# Altium PCB ESP32PCBc[1].PcbDoc (part 3 of 3)
Units mil, origin at the board's own origin, x right, y up, seen from the top; angles counter-clockwise.
Board outline 5118.11 x 3346.46 mil, 4 copper layers (L1, L2, L3, L4), stack 61.583 mil thick; 55 components, 53 nets, 223 pads, 182 vias.
Unrouted connection lines stored in the file: 1.
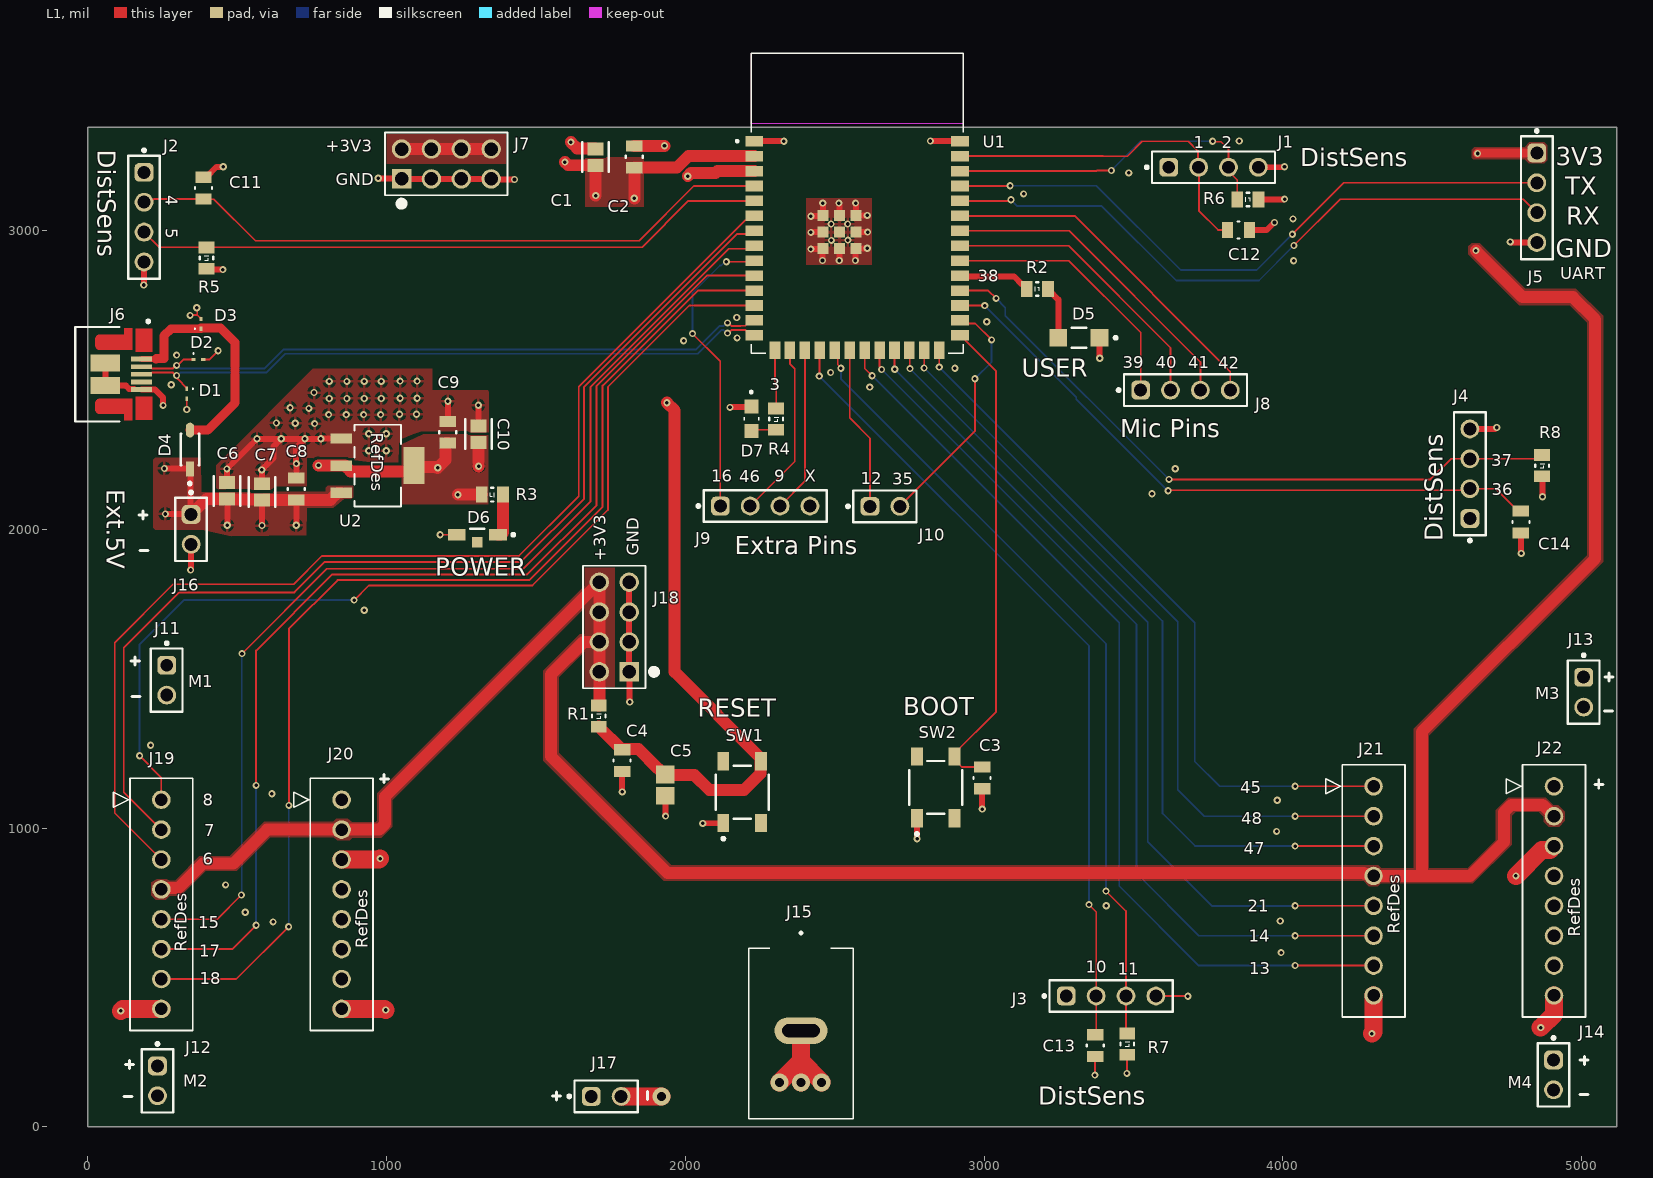
[diagram p0: L1 view]

## Part data (continued)
SW1 SW2: "Switch Tactile OFF Mom SPST Round Button Gull Wing 50mA 12VDC 100000Cycles 1.77N Surface Mount T/R", Contact Current Rating=50mA, Contact Resistance=100mΩ, Insulation Resistance=100MΩ, Manufacturer="C&K Components", Max Operating Temperature=70°C, Max Voltage Rating (DC)=12V, Min Operating Temperature=-40°C, Operating Force=2.26N, Supplier Part Number=108-PTS647SM38SMTR2LFSCT-ND, Category="Tactile Switches", ComponentLink1Description=https://datasheet.octopart.com:443/PTS647SM38SMTR2LFS-C%26K-Components-datasheet-180017464.pdf?src-supplier=IHS, ComponentLink1URL=https://datasheet.octopart.com:443/PTS647SM38SMTR2LFS-C%26K-Components-datasheet-180017464.pdf?src-supplier=IHS, ComponentLink2Description=https://datasheet.octopart.com:443/PTS647SM38SMTR2LFS-C%26K-Components-datasheet-117317067.pdf?src-supplier=Future+Electronics, ComponentLink2URL=https://datasheet.octopart.com:443/PTS647SM38SMTR2LFS-C%26K-Components-datasheet-117317067.pdf?src-supplier=Future+Electronics, ComponentLink3Description=https://datasheet.octopart.com:443/PTS647SM38SMTR2-LFS-C%26K-Components-datasheet-175422368.pdf?src-supplier=Farnell, ComponentLink3URL=https://datasheet.octopart.com:443/PTS647SM38SMTR2-LFS-C%26K-Components-datasheet-175422368.pdf?src-supplier=Farnell, ComponentLink4Description=https://datasheet.octopart.com:443/PTS647SM38SMTR2LFS-C%26K-Components-datasheet-145017121.pdf?src-supplier=Electro+Sonic, ComponentLink4URL=https://datasheet.octopart.com:443/PTS647SM38SMTR2LFS-C%26K-Components-datasheet-145017121.pdf?src-supplier=Electro+Sonic, ComponentLink5Description=https://datasheet.octopart.com:443/PTS-647-SM38-SMTR2-LFS-C%26K-Components-datasheet-119449707.pdf?src-supplier=RS+(Formerly+Allied+Electronics), ComponentLink5URL=https://datasheet.octopart.com:443/PTS-647-SM38-SMTR2-LFS-C%26K-Components-datasheet-119449707.pdf?src-supplier=RS+(Formerly+Allied+Electronics), Electrical Life=100kcycles, Height=2.9mm, Length=4.5mm, Life (Cycles)=100kcycles, Lifecycle Status=Production, Manufacturer Part Number=PTS647SM38SMTR2LFS, Max Current Rating=50mA, Mounting Technology="Surface Mount", Number of Positions=1, Pricing="1=0.26, 10=0.226, 25=0.2116, 100=0.1897, 250=0.17588, 500=0.16596, 1000=0.15666 (USD)", REACH SVHC=Yes, RoHS=Compliant, Schedule B="8536509065, 8536509065|8536509065, 8536509065|8536509065|8536509065, 8536509065|8536509065|8536509065|8536509065", Stock=37562, Supplier=DigiKey, Throw Configuration=SPST, Voltage Rating (DC)=12V
U1: "SMD module, ESP32-S3R8 with 8 MB Octal PSRAM die inside, 8 MB Quad SPI flash, P", Manufacturer="Espressif Systems", Manufacturer Part Number=ESP32-S3-WROOM-1-N8R8, Max Operating Temperature=65°C, Max Supply Voltage=3.6V, Min Operating Temperature=-40°C, Min Supply Voltage=3V, Operating Supply Voltage=3.3V, Package=None, Supplier Part Number=5407-ESP32-S3-WROOM-1-N8R8DKR-ND, Supplier Part Number 1=5407-ESP32-S3-WROOM-1-N8R8CT-ND, Availability="In Stock", Category="RF Transceiver Modules and Modems", Check_prices=https://www.snapeda.com/parts/ESP32-S3-WROOM-1-N8R8/Espressif+Systems/view-part/?ref=eda, ComponentLink1Description=https://datasheet.octopart.com:443/ESP32-S3-WROOM-1-N8R8-Espressif-Systems-datasheet-165560563.pdf?src-supplier=IHS, ComponentLink1URL=https://datasheet.octopart.com:443/ESP32-S3-WROOM-1-N8R8-Espressif-Systems-datasheet-165560563.pdf?src-supplier=IHS, ComponentLink2Description=https://datasheet.octopart.com:443/ESP32-S3-WROOM-1-N8R8-Espressif-Systems-datasheet-175575506.pdf?src-supplier=SOS+electronic, ComponentLink2URL=https://datasheet.octopart.com:443/ESP32-S3-WROOM-1-N8R8-Espressif-Systems-datasheet-175575506.pdf?src-supplier=SOS+electronic, ComponentLink3Description=https://datasheet.octopart.com:443/ESP32-S3-WROOM-1-N8R8-Espressif-Systems-datasheet-164663773.pdf?src-supplier=SOS+electronic, ComponentLink3URL=https://datasheet.octopart.com:443/ESP32-S3-WROOM-1-N8R8-Espressif-Systems-datasheet-164663773.pdf?src-supplier=SOS+electronic, ComponentLink4Description=https://datasheet.octopart.com:443/ESP32-S3-WROOM-1-N8R8-Espressif-Systems-datasheet-188867343.pdf?src-supplier=TME, ComponentLink4URL=https://datasheet.octopart.com:443/ESP32-S3-WROOM-1-N8R8-Espressif-Systems-datasheet-188867343.pdf?src-supplier=TME, ComponentLink5Description=https://datasheet.octopart.com:443/ESP32-S3-WROOM-1-N8R8-Espressif-Systems-datasheet-165560559.pdf?src-supplier=TME, ComponentLink5URL=https://datasheet.octopart.com:443/ESP32-S3-WROOM-1-N8R8-Espressif-Systems-datasheet-165560559.pdf?src-supplier=TME, Height - Seated (Max)=3.25mm, Length=25.5mm, MF="Espressif Systems", MP=ESP32-S3-WROOM-1-N8R8, Number of Terminals=41, Price=None, Pricing="1=6.13, 10=5.313, 25=5.0276, 100=4.635, 250=4.39984 (USD)", Purchase-URL=https://pricing.snapeda.com/search?q=ESP32-S3-WROOM-1-N8R8&ref=eda, REACH SVHC=Yes, RoHS=Compliant, SnapEDA_Link=https://www.snapeda.com/parts/ESP32-S3-WROOM-1-N8R8/Espressif+Systems/view-part/?ref=snap, Stock=8462, Supplier=DigiKey, Supplier 1=DigiKey, Terminal Pitch=1.27mm, Width=18mm
U2: "800-mA 15-V linear voltage regulator 800-mA 15-V linear voltage regulator", Ambient Temperature Range High=125°C, Case/Package=SOT-223, Dropout Voltage=1.07V, Manufacturer=onsemi, Manufacturer Lifecycle Status=ACTIVE, Max Junction Temperature (Tj)=150°C, Max Supply Voltage=15V, Min Input Voltage=4.75V, Min Operating Temperature=0°C, Output Current=800mA, Output Voltage=3.3V, Supplier Part Number=488-LM1117MPX-33NOPBDKR-ND, Voltage Tolerance=2%, Accuracy=1%, Category="LDO Voltage Regulators", China RoHS=Compliant, ComponentLink1Description=https://datasheet.octopart.com:443/LM1117MPX-33NOPB-onsemi-datasheet-164331219.pdf?src-supplier=Upverter, ComponentLink1URL=https://datasheet.octopart.com:443/LM1117MPX-33NOPB-onsemi-datasheet-164331219.pdf?src-supplier=Upverter, ComponentLink2Description=https://sigma.octopart.com:443/138897734/technical_drawing/onsemi-LM1117MPX-33NOPB.pdf?src-supplier=Upverter, ComponentLink2URL=https://sigma.octopart.com:443/138897734/technical_drawing/onsemi-LM1117MPX-33NOPB.pdf?src-supplier=Upverter, ComponentLink3Description=https://datasheet.octopart.com:443/LM1117MPX-33NOPB-ON-Semiconductor-datasheet-141931467.pdf?src-supplier=JRH+Electronics, ComponentLink3URL=https://datasheet.octopart.com:443/LM1117MPX-33NOPB-ON-Semiconductor-datasheet-141931467.pdf?src-supplier=JRH+Electronics, ComponentLink4Description=https://datasheet.octopart.com:443/LM1117MPX-33NOPB-onsemi-datasheet-180961324.pdf?src-supplier=IHS, ComponentLink4URL=https://datasheet.octopart.com:443/LM1117MPX-33NOPB-onsemi-datasheet-180961324.pdf?src-supplier=IHS, ComponentLink5Description=https://datasheet.octopart.com:443/LM1117MPX-33NOPB-onsemi-datasheet-168933395.pdf?src-supplier=Future+Electronics, ComponentLink5URL=https://datasheet.octopart.com:443/LM1117MPX-33NOPB-onsemi-datasheet-168933395.pdf?src-supplier=Future+Electronics, ComponentLink6Description=http://sigma.octopart.com:80/reach_statement/ON-Semiconductor-company-79.pdf?src-supplier=Compliance+Statements, ComponentLink6URL=http://sigma.octopart.com:80/reach_statement/ON-Semiconductor-company-79.pdf?src-supplier=Compliance+Statements, ComponentLink7Description=https://octopart.com:443/opatz8j6/c1?t=Iw_9X4aOcrUl-cPA66dx16ukuJxMweABa0km8qscBKXSU1vYCRq_e4FXJATwxyh124XiaTPtNJ3B9yRxDq_EhavdUU79idWvw_QVFCQ2fS5CQqS4hTb1ifBnFTR-Su749rPEe84Onex6ks4rk9ucP4YVcK4nPzU0XZG6GDKd_pBht-2jM3AE4nGkwXEe6Ksn9x1m2VuOf8AcrWjARzJEmpW0n5uUxMgVrQJ7fVm_XNdLbK-fij8J55BUuF-vYILHBnvsIretFbyyyfqB2jts5YEtD5ypze82yLluaey9lD5qNXSO72sWgsX8XjPSqf-JEzZbFkY95Oi87kzI9m6odTwj0wO7px43NJiKE00YhpVnv7QYBQ&src-supplier=Compliance+Statements, ComponentLink7URL=https://octopart.com:443/opatz8j6/c1?t=Iw_9X4aOcrUl-cPA66dx16ukuJxMweABa0km8qscBKXSU1vYCRq_e4FXJATwxyh124XiaTPtNJ3B9yRxDq_EhavdUU79idWvw_QVFCQ2fS5CQqS4hTb1ifBnFTR-Su749rPEe84Onex6ks4rk9ucP4YVcK4nPzU0XZG6GDKd_pBht-2jM3AE4nGkwXEe6Ksn9x1m2VuOf8AcrWjARzJEmpW0n5uUxMgVrQJ7fVm_XNdLbK-fij8J55BUuF-vYILHBnvsIretFbyyyfqB2jts5YEtD5ypze82yLluaey9lD5qNXSO72sWgsX8XjPSqf-JEzZbFkY95Oi87kzI9m6odTwj0wO7px43NJiKE00YhpVnv7QYBQ&src-supplier=Compliance+Statements, Height=1.8mm, Height - Seated (Max)=1.8mm, Length=6.5mm, Lifecycle Status=Production, Manufacturer Part Number=LM1117MPX-33NOPB, Max Operating Temperature=125°C, Number of Channels=1, Number of Circuits=1, Number of Outputs=1, Number of Terminals=4, Pricing="1=0.57, 10=0.4, 25=0.3576, 100=0.3116, 250=0.28964, 500=0.27638, 1000=0.26546 (USD)", REACH SVHC=Yes, RoHS=Compliant, Stock=7642, Supplier=DigiKey, Terminal Pitch=2.3mm, Width=3.5mm

## Via types
v1: diameter 24, hole 12, L1 to L4, tented both sides, 178 vias
v2: diameter 60, hole 30, L1 to L4, tented both sides, 4 vias

## Nets (pads, with @x,y where several pads share a name; then routed paths per layer and width w, separated by ;. In a path a pad name is that pad's centre, name@x,y a point inside that pad or via, vN(x,y) a via of type N, cw(c..) or ccw(c..) an arc to the next point about the centre after c; other vN are vias at no path point)
3V3: C1.2 C2.2 C9.2 C10.2 J5.1 J7.5 J7.6 J7.7 J7.8 J18.5 J18.6 J18.7 J18.8 J19.4 J20.2 J21.4 J22.2 R1.1 R3.2 U1.2 U2.2 | length 13864.4
  L1 w30: v1(4652,3258) 4653,3259 4849,3259 J5.1
  L1 w40: J19.4 250.04,798.97 302.66,798.97 384.69,881 486,881 599.76,994.76 J20.2 974.76,994.76 995,1015 995,1106 J18.5 J18.6 J18.7 ; v1(772,2214) 772.5,2213.5 847.5,2213.5 848,2213 860.5,2213 879.5,2194 1076.5,2194 U2.2@1092,2209.5 ; J7.8 J7.7 J7.6 J7.5 ; U2.2@1092,2213 1103.29,2213 1107.5,2208.79 1168.21,2208.79 v1(1171,2206) 1197.44,2232.44 1197.44,2287.28 1198.74,2288.58 C9.2 ; v1@1238.98,2116 R3.2 ; v1(1308,2211) C10.2 ; v1(1596.65,3229.39) 1607.35,3218.7 1698.71,3218.7 1699.21,3218.2 1699.21,3117.79 v1(1700,3117) ; R1.1 1711.69,1410.43 1712,1410.75 J18.8 J18.7 ; v1(1829,3108) C2.2 1971.53,3210.58 2010.16,3249.21 U1.2 ; v1(4646,2933) 4802,2777 4971,2777 5045,2703 5045,1902 4465.27,1322.27 4465.27,839.88 ; J22.2 4869.3,1078 4765,1078 4740,1053 4740,953 4626.88,839.88 4465.27,839.88 ; J18.7 1659,1623 1550,1514 1550,1240 1940,850 4270.67,850 4274.79,845.89 4297.42,845.89 J21.4 4303.66,839.88 4465.27,839.88
  L2 w40: J7.8 J7.7 J7.6 J7.5 1387,3236 1590.05,3236 v1(1596.65,3229.39) ; v1(1171,2206) 1176,2211 v1(1308,2211) 1318.51,2200.49 1417.49,2200.49 1506.07,2289.07 ; v1@1595,3229.39 1595,3060 1474.57,2939.57 1474.57,2320.57 1506.07,2289.07 ; J18.5 1712,2083.15 1506.07,2289.07 ; v1(4646,2933) 4646,3252 v1(4652,3258)
  other v1: 1238.78,2115.79
12V: J15.1 J17.1 J20.1 J22.1 | length 5990.5
  L2 w60: J20.1 1073.24,1094.76 1797.47,370.53 ; J17.1 1685,258.06 1797.47,370.53 ; J22.1 4872.3,1175 4551.15,1175 4516,1139.85 4516,141.15 4480.85,106 3144,106 2679.97,570.03 J15.1 1996.97,570.03 1797.47,370.53
CHIP_PU: C4.2 C5.1 R1.2 SW1.4 U1.3 | length 3064.1
  L1 w40: R1.2 1784.57,1265 1842.45,1265 1908.02,1199.43 1909,1199.43 1931.03,1177.41 2030.59,1177.41 2080,1128 2197,1128 2251,1182 2251,1221.35 SW1.4 2252.99,1234.17 1964,1523.17 1964,2398 v1(1938,2424) ; v1(2008,3182) 2018.93,3192.93 2100.93,3192.93 2107.21,3199.21 U1.3
  L2 w40: v1(1938,2424) 1910,2452 1910,3084 v1(2008,3182)
GND: C1.1 C2.1 C3.1 C4.1 C5.2 C6.1 C7.1 C8.1 C9.1 C10.1 C11.1 C12.1 C13.1 C14.1 D1.2 D2.2 D3.2 D5.1 D6.2 D7.1 J1.4 J2.4 J3.4 J4.4 J5.4 J6.5 J6.6 J6.7 J6.8 J6.9 J6.10 J6.11 J7.1 J7.2 J7.3 J7.4 J15.2 J16.2 J17.2 J18.1 J18.2 J18.3 J18.4 J19.8 J20.3 J20.8 J21.8 J22.3 J22.8 R5.2 R6.2 R7.2 R8.2 SW1.1 SW2.1 U1.1 U1.40 U1.41_1 U1.41_2 U1.41_3 U1.41_4 U1.41_5 U1.41_6 U1.41_7 U1.41_8 U1.41_9 U2.1 | length 6135.6
  L1 w6: v1(331,2401) D1.2 ; v1(342,2716) 343.48,2717.48 366,2717.48 ; v1@366,2740 366,2717.48 ; D3.2 366,2717.48 ; D2.2 406,2568 v1(436,2598) ; v1(1179,1982) v1(1179,1982) 1234.87,1981.95 D6.2 ; v1(3371,173) 3371,234.58 C13.1 ; R7.2@3476.01,238.57 R7.2 3478,240.57 v1(3478,178.98) ; J3.4 3575.5,437.5 3681.5,437.5 v1(3682,437)
  L1 w20: J6.10 J6.11 126.85,2481.11 138.42,2469.54 J6.5@155.05,2469.54 ; J6.5 225.18,2467.82 252,2441 v1(252,2415) ; v1(187,2818) 187.77,2818.77 J2.4@187.77,2895.77 ; v1(344,1864) 344.75,1864.75 344.75,1949.18 J16.2 ; C11.1 395.86,3178.42 430.09,3212.65 452.23,3212.65 v1(453,3213.42) ; R5.2 399.23,2870.33 451.23,2870.33 v1(452,2869.57) ; C6.1 v1(465.54,2202.45) v1(566.14,2303.05) v1(647.05,2303.05) ; C7.1 582.5,2153.09 582.5,2198.5 v1(582,2199) 621,2238 621,2277 v1(647.05,2303.05) ; C8.1 v1(698,2220) 697.23,2220.77 697.23,2273.81 v1(726.47,2303.05) ; U2.1 847.75,2303.3 780.17,2303.3 v1(779.92,2303.05) v1(726.47,2303.05) ; v1(972,3175) 972.5,3174.5 J7.1@1052.5,3174.5 ; J7.1 J7.2 J7.3 J7.4 ; C9.1 v1(1205,2429) ; v1(1307,2415.17) 1307.5,2414.67 C10.1@1307.5,2347.09 ; J7.4@1347.5,3171.5 1427.5,3171.5 v1(1428,3171) ; C4.1@1788.5,1189.08 1788.5,1121.5 v1(1789,1121) ; J18.1 J18.2 J18.3 J18.4 ; J18.1@1812.5,1522.5 1812.5,1424.58 1814,1423.08 v1(1814,1422) ; C5.2@1933.5,1108.07 1933.5,1040.48 v1(1934,1039.98) ; v1(2058.43,1015.65) 2058.93,1016.15 SW1.1@2126.51,1016.15 ; v1(2149.42,2408.34) 2149.92,2408.84 D7.1@2217.5,2408.84 ; U1.1 v1@2329.21,3299.21 ; v1(2420,2994) 2420.64,2994.64 2460.19,2994.64 U1.41_2 ; v1(2420,3048) 2420.77,3048.77 2458.37,3048.77 2460.41,3050.81 2460.41,3091.59 v1(2460,3092) ; v1@2421.08,2938 v1(2420,2938) 2420.77,2938.77 2459.43,2938.77 2459.77,2939.1 2459.77,2900.77 v1(2459,2900) ; v1(2514,3092) 2514,3090.92 2515.94,3088.97 U1.41_8 ; v1(2515,2900) 2515.47,2900.47 2515.47,2939.69 U1.41_5 ; v1@2542.67,3022 v1(2543,3022) ; v1(2569,2900) 2569.77,2900.77 2569.77,2938.86 U1.41_6 2571.48,2940.58 2608.58,2940.58 v1(2609,2941) ; v1(2570,3092) 2570.53,3091.47 2570.53,3050.93 U1.41_9 2571.37,3050.7 2608.7,3050.7 v1(2609,3051) ; U1.41_3 2571.2,2995.14 2609.86,2995.14 v1(2610,2995) ; SW2.1 2775.01,965.07 v1(2775.51,964.57) ; v1(2820,3300) 2820.39,3299.61 2919.09,3299.61 U1.40 ; C3.1 2993,1064 v1(2993.5,1063.5) ; D5.1@3386.71,2640.64 3386.71,2573.05 v1(3387.21,2572.55) ; C12.1 3945.92,3002 3970.92,3027 v1(3972,3027) ; J1.4 4002.92,3212 4004.42,3213.5 v1(4005.5,3213.5) v1@4006.27,3212.73 ; R6.2 4003.35,3104 4004.85,3105.5 v1(4005.93,3105.5) ; J4.4@4626.5,2336.5 4710.42,2336.5 4714.92,2341 v1(4716,2341) ; v1(4761,2962) 4762.08,2962 4764.58,2959.5 J5.4@4849.5,2959.5 ; C14.1@4797.5,1987.67 4797.5,1920.08 v1(4798,1919.58) ; R8.2@4868.5,2177.07 4868.5,2109.48 v1(4869,2108.98) ; v1(647.05,2303.05) v1(726.47,2303.05)
  L1 w40: v1(1617,3296) 1637.67,3275.33 1697.26,3275.33 C1.1 ; C2.1 v1@1929.41,3283.42
  L1 w60: v1(110,388) 116.76,394.76 J19.8 ; J20.8 993.24,394.76 v1(997,391) ; J20.3 974.76,894.76 v1(978,898) ; J17.2 1919,102 v2(1920,101) ; v2(2315,148) 2387,220 ; v2(2387,148) 2387,220 ; J15.2 2387,220 ; v2(2456,148) 2456,151 2387,220 ; v1(4298,312) 4303.54,317.54 J21.8 ; v1(4780,840) 4866.49,926.49 4893.73,926.49 4907,939.76 J22.3 ; v1(4863,332) 4907.16,376.16 4907.16,439.38 J22.8
  other v1: 3994,583 620,686 3991,689 527,718 3409,740 461,810 3979,989 3981,1093 616,1115 210,1277 925,1729 3562,2119 3640,2203 940,2263 999,2263 940,2320 999,2320 759,2354 694,2355 631,2356 806,2384 865,2384 923,2384 980,2384 1043,2385 1100,2385 740,2405 677,2407 808,2438 867,2438 925,2438 982,2438 1045,2439 1102,2439 757,2458 2617,2476 279,2484 808,2495 867,2495 925,2495 982,2495 1045,2496 1102,2496 2486,2525 2902,2539 297,2583 1994,2631 2173,2641 3009,2695 2172,2709 364.52,2741.48 4036,2899 2489,2967 2544,2968 2488,3022 4034,3039 3132,3123 3484,3193 1930.2,3284.21 2329.61,3298.82 3854,3300
GPIO0: C3.2 SW2.4 U1.27 | length 1630.2
  L1 w6: U1.27 3040,2528.7 3040,1389.18 2900.99,1250.17 SW2.4 2900.99,1228.52 2925.09,1204.42 C3.2
GPIO1: C12.2 J1.2 U1.39 | length 1154.9
  L1 w6: U1.39 3397.79,3249.21 3398,3249 3480,3249 3530,3299 3683,3299 3716,3266 3716,3214 J1.2 3719.12,3210.88 3719.12,3065.88 3782.75,3002.25 3814.92,3002.25 C12.2
GPIO2: J1.3 R6.1 U1.38 | length 1131.4
  L1 w6: U1.38 3375.79,3199.21 3377.57,3201 v1(3426,3201) ; v1(3765,3299) 3766.72,3297.28 3792.93,3297.28 3818,3272.21 J1.3 3818,3199.01 3847.57,3169.45 R6.1
  L4 w6: v1(3426,3201) 3524,3299 v1(3765,3299)
GPIO3: R4.1 U1.15 | length 197.2
  L1 w6: U1.15 2300,2496.43 2304,2492.43 R4.1
GPIO4: C11.2 J2.2 U1.4 | length 2180.4
  L1 w6: J2.2 197.18,3104.18 219.38,3104.18 220.78,3105.58 C11.2 ; C11.2@387,3105.17 421.83,3105.17 561,2966 1845,2966 2028.21,3149.21 U1.4
GPIO5: J2.3 R5.1 U1.5 | length 2127.9
  L1 w6: J2.3 239,2944 397,2944 1855,2944 2010.21,3099.21 U1.5
GPIO6: J19.3 U1.6 | length 3737.3
  L1 w6: J19.3 90,1050.6 90,1621 285,1816 688.6,1816 783.6,1911 1443,1911 1643,2111 1643,2477 2200.5,3034.5 2215.8,3034.5 U1.6
GPIO7: J19.2 U1.7 | length 3568.3
  L1 w6: J19.2 120,1120.6 120,1603 306,1789 691.3,1789 793.3,1891 1449,1891 1661,2103 1661,2477 2173,2989 2220.3,2989 U1.7
GPIO8: J19.1 U1.12 | length 3319.1
  L1 w6: v1(173,1242) 245.83,1169.17 J19.1 ; v1(891,1763) 940,1812 1488,1812 1741,2065 1741,2477 2013.21,2749.21 U1.12
  L4 w6: v1(173,1242) 173,1615 321,1763 v1(891,1763)
GPIO9: J9.3 U1.17 | length 556.4
  L1 w6: J9.3 2400,2161 U1.17
GPIO10: C13.2 J3.2 U1.18 | length 2677.6
  L1 w6: v1(2448,2513) 2449,2514 2449,2599 U1.18 ; v1(3351,744) 3351,743.21 3375,719.21 3375,311.42 C13.2
  L4 w6: v1(2448,2513) 3351,1610 v1(3351,744)
GPIO11: J3.3 R7.1 U1.19 | length 2693.1
  L1 w6: U1.19 2510.22,2589.78 2510.22,2551.72 2520.5,2541.44 v1(2520.5,2539) ; v1(3408,789) 3475,722 3475,316.43 R7.1
  L4 w6: v1(2520.5,2539) 2520.5,2504.5 3408,1617 v1(3408,789)
GPIO12: J10.1 U1.20 | length 551.2
  L1 w6: U1.20 2550,2373.17 2618,2305.17 J10.1
GPIO13: J21.7 U1.21 | length 3108.9
  L1 w6: U1.21 2600.5,2599.5 2600.5,2538.5 v1(2625,2514) ; v1(4041,540) 4041.12,539.88 4303.42,539.88 J21.7
  L4 w6: v1(2625,2514) 3452,1687 3452,806 3718.24,539.76 4040.76,539.76 v1(4041,540)
GPIO14: J21.6 U1.22 | length 2987.3
  L1 w6: U1.22 2650,2544.44 2657,2537.44 v1(2657,2535) ; v1@4041.24,639.76 J21.6
  L4 w6: v1(2657,2535) 3510,1682 3510,849 3719.12,639.88 v1(4041.12,639.88)
GPIO15: J19.5 U1.8 | length 3615.6
  L1 w6: J19.5 432.76,694.76 v1(514,776) ; v1(516,1584) 800,1868 1458,1868 1682,2092 1682,2476 2145,2939 2220.3,2939 U1.8
  L4 w6: v1(514,776) 515,777 515,1583 v1(516,1584)
GPIO16: J9.1 U1.9 | length 1002.9
  L1 w6: v1(2024,2655) 2117,2562 J9.1 ; v1(2137.18,2895.82) 2227.12,2895.82 U1.9
  L4 w6: v1(2024,2655) 2024,2791 2116.03,2883.03 2120.27,2883.03 2133.07,2895.82 v1(2137.18,2895.82)
GPIO17: J19.6 U1.10 | length 3690.6
  L1 w6: J19.6 482.76,594.76 v1(563,675) ; v1(563,1143) 563,1594 818,1849 1471,1849 1703,2081 1703,2480 2072.21,2849.21 U1.10
  L4 w6: v1(563,675) v1(563,1143)
GPIO18: J19.7 U1.11 | length 3760.5
  L1 w6: J19.7 496.76,494.76 v1(672,670) ; v1(673,1076) 673,1667 836,1830 1478,1830 1723,2075 1723,2481 2041.21,2799.21 U1.11
  L4 w6: v1(672,670) 672.5,670.5 672.5,1075.5 v1(673,1076)
GPIO21: J21.5 U1.23 | length 2842.1
  L1 w6: U1.23 2700.5,2599.5 2700.5,2536.5 v1(2701,2536) ; v1@4041.24,739.76 J21.5
  L4 w6: v1(2701,2536) 3548,1689 3548,954 3763,739 4040.24,739 v1(4041.12,739.88)
GPIO35: J10.2 U1.28 | length 816.7
  L1 w6: J10.2 2969,2328 v1(2969,2504) ; U1.28 2929.7,2689 2970,2689 v1(3025,2634)
  L4 w6: v1(2969,2504) 3025,2560 v1(3025,2634)
GPIO36: C14.2 J4.2 U1.29 | length 2172.3
  L1 w6: U1.29 2919.59,2749.11 3001.89,2749.11 v1(3002,2749) ; v1(3616,2129) 3617.72,2130.72 4620.72,2130.72 J4.2 4713.14,2136 4788.14,2061 C14.2
  L4 w6: v1(3002,2749) 3308.21,2442.79 3308.21,2436.07 3615.28,2129 v1(3616,2129)
GPIO37: J4.3 R8.1 U1.30 | length 2259.9
  L1 w6: U1.30 3013.79,2799.21 v1(3040,2773) ; v1(3619,2167) 4494,2167 4563,2236 J4.3 4848.68,2236 4861.11,2248.43 R8.1
  L4 w6: v1(3040,2773) 3071,2742 3071,2715 v1(3619,2167)
GPIO38: R2.1 U1.31 | length 245.8
  L1 w20: U1.31 2922.09,2846.61 3099.96,2846.61 3125.99,2820.57 3132.88,2820.57 3142.57,2810.89 R2.1
GPIO39: J8.1 U1.32 | length 897
  L1 w6: U1.32 3283.79,2899.21 3524,2659 J8.1
GPIO40: J8.2 U1.33 | length 987.8
  L1 w6: U1.33 3282.79,2949.21 3624,2608 J8.2
GPIO41: J8.3 U1.34 | length 1080.4
  L1 w6: U1.34 3284.79,2999.21 3724,2560 J8.3
GPIO42: J8.4 U1.35 | length 1182.4
  L1 w6: U1.35 3302.79,3049.21 3824,2528 J8.4
GPIO45: J21.1 U1.26 | length 2364
  L1 w6: v1(2850,2543) U1.26 ; v1@4041.24,1139.76 J21.1
  L4 w6: v1(2850,2543) 3705,1688 3705,1223 3788.12,1139.88 v1(4041.12,1139.88)
GPIO46: J9.2 U1.16 | length 590.3
  L1 w6: J9.2 2366,2227 2366,2538 2350,2554 U1.16
GPIO47: J21.3 U1.24 | length 2653.5
  L1 w6: U1.24 2751,2599 2751,2539 v1(2752,2538) ; v1@4041.24,939.76 J21.3
  L4 w6: v1(2752,2538) 3597,1693 3597,1049 3706.12,939.88 v1(4041.12,939.88)
GPIO48: J21.2 U1.25 | length 2515.4
  L1 w6: v1(2799,2540) 2799.5,2540.5 2799.5,2599.5 U1.25 ; v1@4041.24,1039.76 J21.2
  L4 w6: v1(2799,2540) 3648,1691 3648,1129 3737.12,1039.88 v1(4041.12,1039.88)
Motor1+: J11.1 J20.4 | length 1142.5
  L2 w60: J11.1 297,1578 401.85,1578 500,1479.85 500,1106 811.24,794.76 J20.4
Motor1-: J11.2 J20.5 | length 1080.6
  L2 w60: J11.2 264.57,1444.43 335.43,1444.43 413,1366.85 413,1052 770.24,694.76 J20.5
Motor2+: J12.1 J20.6 | length 778.3
  L2 w60: J12.1 375.54,204 766.3,594.76 J20.6
Motor2-: J12.2 J20.7 | length 778.3
  L2 w60: J12.2 412,104 802.76,494.76 J20.7
Motor3+: J13.1 J22.4 | length 863.4
  L2 w60: J22.4 4948.85,839.76 4987,877.91 4987,1254 4884,1357 4884,1463 4924.5,1503.5 5005.5,1503.5 J13.1
Motor3-: J13.2 J22.5 | length 834.6
  L2 w60: J22.5 5035.85,739.76 5071,774.91 5071,1340.19 5007,1404.19 J13.2
Motor4+: J14.1 J22.6 | length 625.2
  L2 w60: J14.1 4904.5,225.5 4823.5,225.5 4778,271 4778,604.62 4813.15,639.76 J22.6
Motor4-: J14.2 J22.7 | length 607.5
  L2 w60: J14.2 4906.57,124.57 4990.57,124.57 5031,165 5031,484 4975.24,539.76 J22.7
NetD3_1: D3.1 D4.2 J6.1 | length 809.9
  L1 w20: J6.1 228.04,2570.18
  L1 w30: 228.04,2570.18 229.78,2571.92 254.69,2571.92 254.69,2647.7 278.36,2671.36 D3.1 ; D4.2 401.18,2332.18 493,2424 493,2624.9 444.54,2673.36 D3.1@379.05,2673.36
NetD5_2: D5.2 R2.2 | length 181.4
  L1 w20: R2.2 3213.43,2797.11 3223.12,2787.43 3230.01,2787.43 3248.42,2769.02 D5.2
NetD6_1: D6.1 R3.1 | length 146.4
  L1 w40: D6.1 1381.93,1981.9 1389.43,1989.41 R3.1
NetD7_2: D7.2 R4.2 | length 85
  L1 w6: D7.2 2225.91,2333.57 R4.2
U0RXD: J5.3 U1.36 | length 2175.2
  L1 w6: U1.36 3085.13,3099.21 3088.92,3103 v1(3090,3103) ; v1(4037,2950) 4192,3105 4805,3105 J5.3
  L4 w6: v1(3090,3103) 3111,3082 3394,3082 3643,2833 3920,2833 v1(4037,2950)
U0TXD: J5.2 U1.37 | length 2168.6
  L1 w6: U1.37 2919.88,3149.61 3086.61,3149.61 v1(3087,3150) ; v1(4032,2988) 4204,3160 J5.2
  L4 w6: v1(3087,3150) 3376,3150 3658,2868 3912,2868 v1(4032,2988)
USB_N: D2.1 J6.2 U1.13 | length 2200.6
  L1 w6.23: J6.2 184.26,2539.83 213.56,2539.83 214.48,2538.91 284.47,2538.91 294.35,2548.8 v1(297,2548.8) 300.31,2548.8 319.52,2568 D2.1 ; v1(2141,2691) 2143.65,2691 2153.53,2681.11 2185.53,2681.11 2185.74,2681.33 2200.82,2681.33 2218.7,2699.21 U1.13
  L4 w6.23: v1(297,2548.8) 299.65,2548.8 309.53,2538.91 591.91,2538.91 655.17,2602.17 2035.69,2602.17 2114.63,2681.11 2128.47,2681.11 2138.35,2691 v1(2141,2691)
USB_P: D1.1 J6.3 U1.14 | length 2194.5
  L1 w6.23: J6.3 184.26,2523.76 213.56,2523.76 214.48,2524.68 284.47,2524.68 294.35,2514.8 v1(297,2514.8) 300.4,2511.4 300.4,2503.3 331,2472.7 D1.1 ; v1(2141,2657) 2143.65,2657 2153.53,2666.89 2191.43,2666.89 2191.64,2667.1 2200.82,2667.1 2218.7,2649.21 U1.14
  L4 w6.23: v1(297,2514.8) 299.65,2514.8 309.53,2524.68 597.8,2524.68 661.06,2587.94 2041.58,2587.94 2120.53,2666.89 2128.47,2666.89 2138.35,2657 v1(2141,2657)
VCC_5V: C6.2 C7.2 C8.2 D4.1 J1.1 J2.1 J3.1 J4.1 J16.1 U2.3 | length 10620.3
  L1 w20: v1@256.77,2202.98 D4.1@341.2,2202.98 ; v1(259.57,2051.44) 260.32,2050.69 344.75,2050.69 J16.1 343.73,2051.71 343.73,2200.45 D4.1 ; v1@467.27,2014.71 C6.2@467.27,2099.14 ; v1@583.59,2013.56 C7.2@583.59,2098 ; v1@698,2014.15 C8.2
  L1 w40: J16.1 396.43,2100.87 C6.2 467.27,2099.14 581.27,2099.14 C7.2 583.59,2098 697.41,2098 C8.2 811.63,2098.58 835.5,2122.45 U2.3
  L2 w20: v1(466.52,2013.95) 515.05,2013.95 516.19,2012.81 v1(582.83,2012.81) 583.13,2013.11 696.95,2013.11 v1(697.25,2013.4)
  L2 w40: J2.1 274,3281 694,3281 737,3238 737,2534 518,2315 518,1953 ; J16.1 442.44,1953 518,1953 ; J3.1 2953,760 ; J1.1 3613,3207 3613,2997 4229,2381 4229,2036 ; J4.1 4229,2036 ; 518,1953 518,1841.43 541.43,1818 730,1818 1788,760 2953,760 ; 2953,760 4229,2036
  other v1: 256.02,2203.73
pads on no net: D6.3 J6.4 J9.4 SW1.2 SW1.3 SW2.2 SW2.3

## Polygon pours and split planes (outlines as drawn)
GND on L1 "GND_L01_P009" (solid, pour order 9): 1341,2318 1242,2318 1241,2319 1241,2329 1118,2329 1088,2319 1048,2302 1039,2248 1039,2223.79 1023.44,2223.13 972.14,2220.96 852.69,2236.69 732,2239 732,2144 625,2144 610,2129 607,2132 432,2132 430,2134 430,2214 555,2339 652.69,2436.69 753,2537 1153,2537 1153,2465 1342.21,2465
3V3 on L1 "3V3_L01_P001" (solid, pour order 1): 1665,3246.24 1665,3080 1860,3080 1860,3246.24
3V3 on L1 "3V3_L01_P027" (solid, pour order 27): 4875,3225 4885,3235 4885,3285 4875,3295 4825,3295 4809,3279 4640,3279 4632,3271 4632,3243 4637,3238 4810,3238 4823,3225
3V3 on L1 "3V3_L01_P026" (solid, pour order 26): 1685,1598 1685,1594 1690,1589 1734,1589 1749,1604 1749,1643 1732,1660 1695,1660 1683,1648 1647,1648 1525,1526 1525,1226 1928,823 4270,823 4288,805 4318,805 4328,815 4636,815 4766,945 4766,1041 4779,1054 4857,1054 4873,1038 4873,1022 4890,1005 4925,1005 4944,1024 4944,1054 4922,1076 4905,1076 4880,1101 4880,1102 4755,1102 4712,1059 4712,959 4617,864 4616,865 4489,865 4489,1309 5072,1892 5072,2715 4981,2806 4811,2806 4659,2958 4632,2958 4621,2947 4621,2920 4791,2750 4961,2750 5019,2692 5019,1913 4438,1332 4438,864.91 4437.91,865 4330,865 4320,875 4211,875 4209,877 4208,876 1953,876 1577,1252 1577,1505 1670,1598
3V3 on L1 "3V3_L01_P025" (solid, pour order 25): 885,1019 964,1019 969,1024 969,1117 1677,1825 1677,1844 1694,1861 1737,1861 1751,1847 1751,1805 1732,1786 1711,1786 1019,1094 1019,1005 982,968 885,968
3V3 on L1 "3V3_L01_P024" (solid, pour order 24): 264.5,828.5 274,823.46 291.65,823.65 297,829 373,905 475,905 591,1021 822,1021 832,1031 870,1031 885,1019 885,968 876,959 834,959 823,969 822,969 611,969 499,857 395,857 311,773 274,773 261,760 228,760 212,776 212,818.2 230,829
GND on L1 "GND_L01_P000" (solid, pour order 0): 2405,3109 2405,2886 2624,2886 2624,3109
3V3 on L1 "3V3_L01_P008" (solid, pour order 8): 1763,1871 1663,1871 1663,1469 1665,1471 1763,1471
3V3 on L1 "3V3_L01_P006" (solid, pour order 6): 1000,3323 1000,3223 1402,3223 1400,3225 1400,3323
VCC_5V on L1 "VCC_5V_L01_P002" (solid, pour order 2): 218.2,2240.33 378.3,2239.81 379.55,2124 435,2124 796.47,2128.02 796.47,2146 888,2145.2 888,2100.15 858.79,2102.68 821.56,2072 732.92,2072 731,1980.66 479.25,1977.49 381.46,1999.24 301,1998.68 218.2,1998.09
3V3 on L1 "3V3_L01_P005" (solid, pour order 5): 1050,2284.12 1050,2084 1341,2084 1341,2318 1122,2318
VCC_5V on L2 "VCC_5V_L02_P012" (solid, pour order 12): 3575,3251 3573,3249 3573,2950 4175.72,2363.87 4171.5,2032.5 2939,800 1805,800 755,1850 558,1857 557.39,1965.57 737.62,1965.57 737.62,2050.95 557.39,2056.74 551,2308 553,2308 774,2529 774,3257 717,3314 265,3314 180.18,3229.18 149,3229.18 149,3152 235,3152 236,3153 233,3156 233,3196 235,3196 288,3249 671,3249 701,3219 700,3218 700,2548 489,2322 488,2308 488,2050 455,2051 387,2050 387,2051 386,2088 383,2090 308,2090 308,2026 309,2021 320,2012 346,2008 433,1921 488,1921 488,1828 531,1785 712,1785 712,1776 1774,724 2939,724 3223,440 3221,438 3221,396 3318,396 3320,394 3323,397 3323,479 3287,479 3006,760 3003,768 3006,760 4245,1994 4257,1994 4664,1994 4673,2008 4673,2064 4671,2070 4658.02,2074.84 4650,2075 4257,2083 4282.5,2083 4282.5,2442.5 3652,3029 3659,3254
3V3 on L2 "3V3_L02_P022" (solid, pour order 22): 4672,2915 4672,3238 4673,3240 4685,3257 4685,3271 4667,3289 4666,3288 4642,3288 4616,3262 4617,3261 4617,2911 4625,2903 4626,2904 4660,2904
Motor3- on L2 "MOTOR3-_L02_P021" (solid, pour order 21): 4872,701 5052,701 5111.38,760.38 5106.5,1215.5 5106.5,1358 5036.01,1428.49 5002.72,1453.49 4948.72,1403 5006.61,1348.61 5030,1330 5030,1175 5030,804 5003,777 4872,777
Motor3+ on L2 "MOTOR3+_L02_P020" (solid, pour order 20): 4868,803 4966,803 5024,861 5019.5,1280.5 5016,1284 4924,1376 4924,1449 4943,1468 5036,1468 5045,1477 5045,1539 5040,1544 4914,1544 4847,1477 4847,1336 4949,1234 4949,893 4931,875 4876,875 4868,867
Motor4- on L2 "MOTOR4-_L02_P019" (solid, pour order 19): 4878,579 4996,579 5068,507 5067,506 5067,143 5009,85 4879,85 4867,97 4867,146 4884,163 4975,163 4989,177 4989,471 4962,498 4871,498 4867,502 4867,571.58 4871,576 4876,576
Motor4+ on L2 "MOTOR4+_L02_P018" (solid, pour order 18): 4927,186 4809,186 4737,258 4738,259 4738,622 4796,680 4926,680 4950,656 4950,616 4935,601 4934,602 4830,602 4816,588 4816,289 4838,267 4934,267 4942,259 4942,197.84 4934,189 4929,189
Motor1+ on L2 "MOTOR1+_L02_P017" (solid, pour order 17): 885,762 884,761 883,762 792,762 466,1088 466,1465 386,1545 311,1545 297,1531 297,1516 293,1512 293,1511 233,1511 232,1514 228,1522 228,1581 251,1581 282,1612 416,1612 538,1490 538,1119 828,829 885,829
Motor1- on L2 "MOTOR1-_L02_P016" (solid, pour order 16): 887,735.23 887,659.85 746,659.85 417,997 376.96,1040.22 366.96,1345.93 318.24,1397.85 218.26,1396 218.26,1481 355.33,1481 450,1394 456.42,1288.82 456.42,1075 787.77,738.54
Motor2+ on L2 "MOTOR2+_L02_P015" (solid, pour order 15): 191,239.17 191,163.82 338.82,163.82 730.67,555.67 883.7,559.2 883.7,630 693.52,630 296.65,242.7
Motor2- on L2 "MOTOR2-_L02_P014" (solid, pour order 14): 200,139 200,71 442.5,64 819,458 882.91,459.48 889.95,528.95 888.7,530.2 788.84,530.2 394.63,145.5
GND on L2 "GND_L02_P023" (solid, pour order 23): 19.23,3323.08 19.23,17.08 5098.23,17.08 5097.23,18.08 5097.23,3323.08
3V3 on L2 "3V3_L02_P011" (solid, pour order 11): 1148,2232 1144.98,2184 1283.04,2184 1308.71,2174 1431,2176 1436,2178 1506,2248 1680,2074 1680,1480 1681,1481 1747,1481 1745,2093 1503,2338 1504,2339 1504,2928 1509,2928 1629,3048 1629,3265 1406,3265 1359,3312 1018,3311 1008,3311 1008,3235 1347,3235 1375,3207 1564,3207 1564,3200 1567,3067 1451,2951 1448,2944 1448,2305 1463,2290 1401,2228 1341.67,2228 1321.79,2245.04
12V on L2 "12V_L02_P013" (solid, pour order 13): 1643,285 1729,371 1734,371 1050,1055 811,1055 811,1136 814,1139 1093,1139 1801,431 1987,617 2703,617 3174,146 4454,146 4474,166 4474,1153 4536,1215 4887,1215 4938,1164 4938,1104.5 4883.5,1104.5 4851,1137 4573,1137 4560,1124 4560,124.91 4491.03,64 4474,64 3120.5,66.5 3100,87 2666,521 2663,518 2012,518 1726,232 1726,57 1724,55 1643,55
GND on L3 (split plane): 5098.01,20.1 20.1,20.1 20.1,3326.36 5098.01,3326.36

## Silkscreen, mask and mechanical layers (free items; w line width, h text height)
Top Overlay:
  lines w10: 121,102 148,102 ; 126,208 153,208 ; 139,195 139,222 ; 145,1559 172,1559 ; 148,1440 175,1440 ; 158,1546 158,1573 ; 171,2048 198,2048 ; 174,1929 201,1929 ; 184,2035 184,2062 ; 979,1165 1006,1165 ; 992,1152 992,1179 ; 1555,103 1582,103 ; 1569,90 1569,117 ; 1873,91 1873,118 ; 4994,109 5021,109 ; 4995,223 5022,223 ; 5009,209 5009,236 ; 5044.38,1146.56 5071.38,1146.56 ; 5057.38,1133.56 5057.38,1160.56 ; 5077,1392 5104,1392 ; 5078,1506 5105,1506 ; 5092,1492 5092,1519
  text "1" at 3702,3276 h40
  text "2" at 3795,3276 h40
  text "DistSens" at 33,3271 h60 r270
  text "+3V3" at 797,3264 h40
  text "3V3" at 4913,3219 h60
  text "DistSens" at 4058,3215 h60
  text "GND" at 829,3151 h40
  text "TX" at 4945,3120 h60
  text "4" at 260,3119 h40 r270
  text "RX" at 4948,3020 h60
  text "5" at 261,3008 h40 r270
  text "GND" at 4914,2910 h60
  text "UART" at 4928,2837 h40
  text "38" at 2979,2829 h40
  text "40" at 3575,2540 h40
  text "41" at 3684,2540 h40
  text "39" at 3464,2539 h40
  text "42" at 3784,2538 h40
  text "USER" at 3126,2510 h60
  text "3" at 2282,2465 h40
  text "Mic Pins" at 3456,2308 h60
  text "37" at 4697,2211 h40
  text "9" at 2298,2160 h40
  text "16" at 2086,2159 h40
  text "X" at 2399,2159 h40
  text "46" at 2180,2157 h40
  text "12" at 2587,2151 h40
  text "35" at 2693,2150 h40
  text "Ext.5V" at 64,2135 h60 r270
  text "36" at 4700,2114 h40
  text "DistSens" at 4535,1960 h60 r90
  text "Extra Pins" at 2166,1917 h60
  text "GND" at 1844,1912 h40 r90
  text "+3V3" at 1733,1893 h40 r90
  text "POWER" at 1163,1844 h60
  text "M1" at 336,1472 h40
  text "M3" at 4845,1432 h40
  text "BOOT" at 2730,1378 h60
  text "RESET" at 2042,1373 h60
  text "45" at 3858,1116 h40
  text "8" at 385,1075 h40
  text "48" at 3860,1013 h40
  text "7" at 389,972 h40
  text "47" at 3869,913 h40
  text "6" at 385,878 h40
  text "21" at 3882,720 h40
  text "15" at 369,664 h40
  text "14" at 3885,620 h40
  text "17" at 373,569 h40
  text "10" at 3340,515 h40
  text "13" at 3888,510 h40
  text "11" at 3448,509 h40
  text "18" at 374,478 h40
  text "M2" at 320,134 h40
  text "M4" at 4752,129 h40
  text "DistSens" at 3182,74 h60
Board Shape:
  lines w20: 0,0 0,3346 5118,3346 5118,0 0,0

## Text inside footprints (layer, text, board x,y; h text height)
J6: Mechanical 1 "PCB Edge" at 11.58,2344.79 h29.53 r270
J19: Mechanical 13 "RefDes2" at 193,583 h40 r90; Top Overlay "RefDes" at 331,586 h40 r90
J20: Mechanical 13 "RefDes2" at 802,590 h40 r90; Top Overlay "RefDes" at 936,598 h40 r90
J21: Mechanical 13 "RefDes2" at 4258,635 h40 r90; Top Overlay "RefDes" at 4392,647 h40 r90
J22: Mechanical 13 "RefDes2" at 4861,614 h40 r90; Top Overlay "RefDes" at 4996,637 h40 r90
U1: Mechanical 13 "ANTENNA" at 2397.83,3466.14 h40
U2: Mechanical 13 "RefDes2" at 945,2300.5 h50 r270; Top Overlay "RefDes" at 949,2323 h40 r270